# EAGLE board shiht_register's_board (EAGLE 8.3.2)
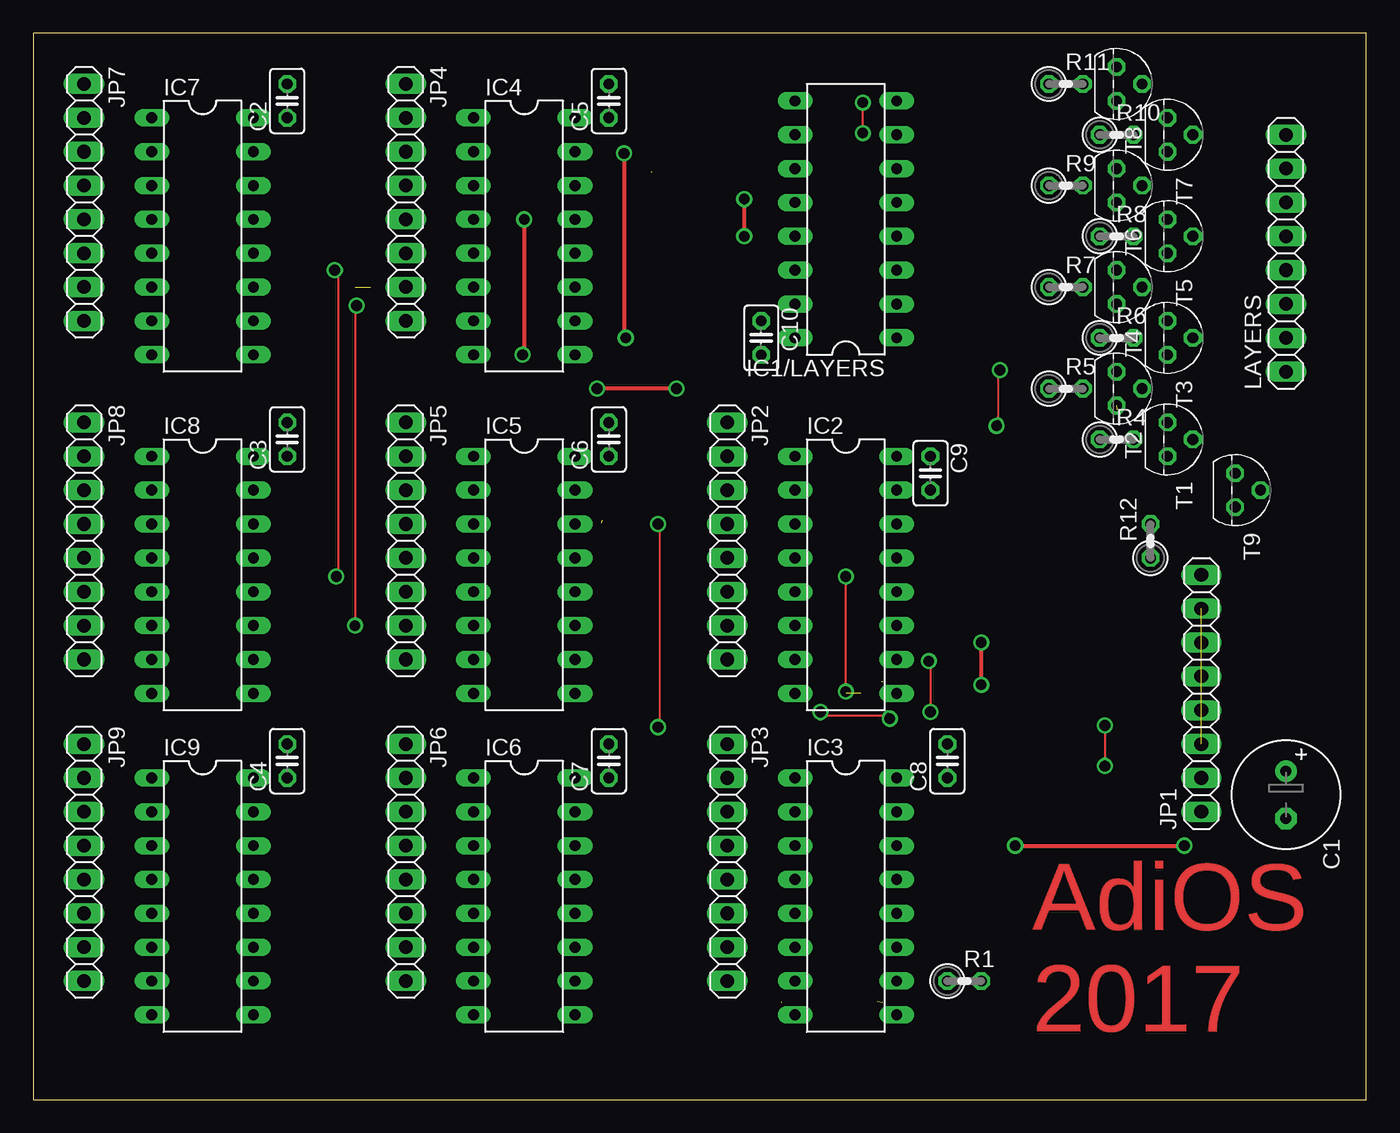
[diagram p0: board, top side]
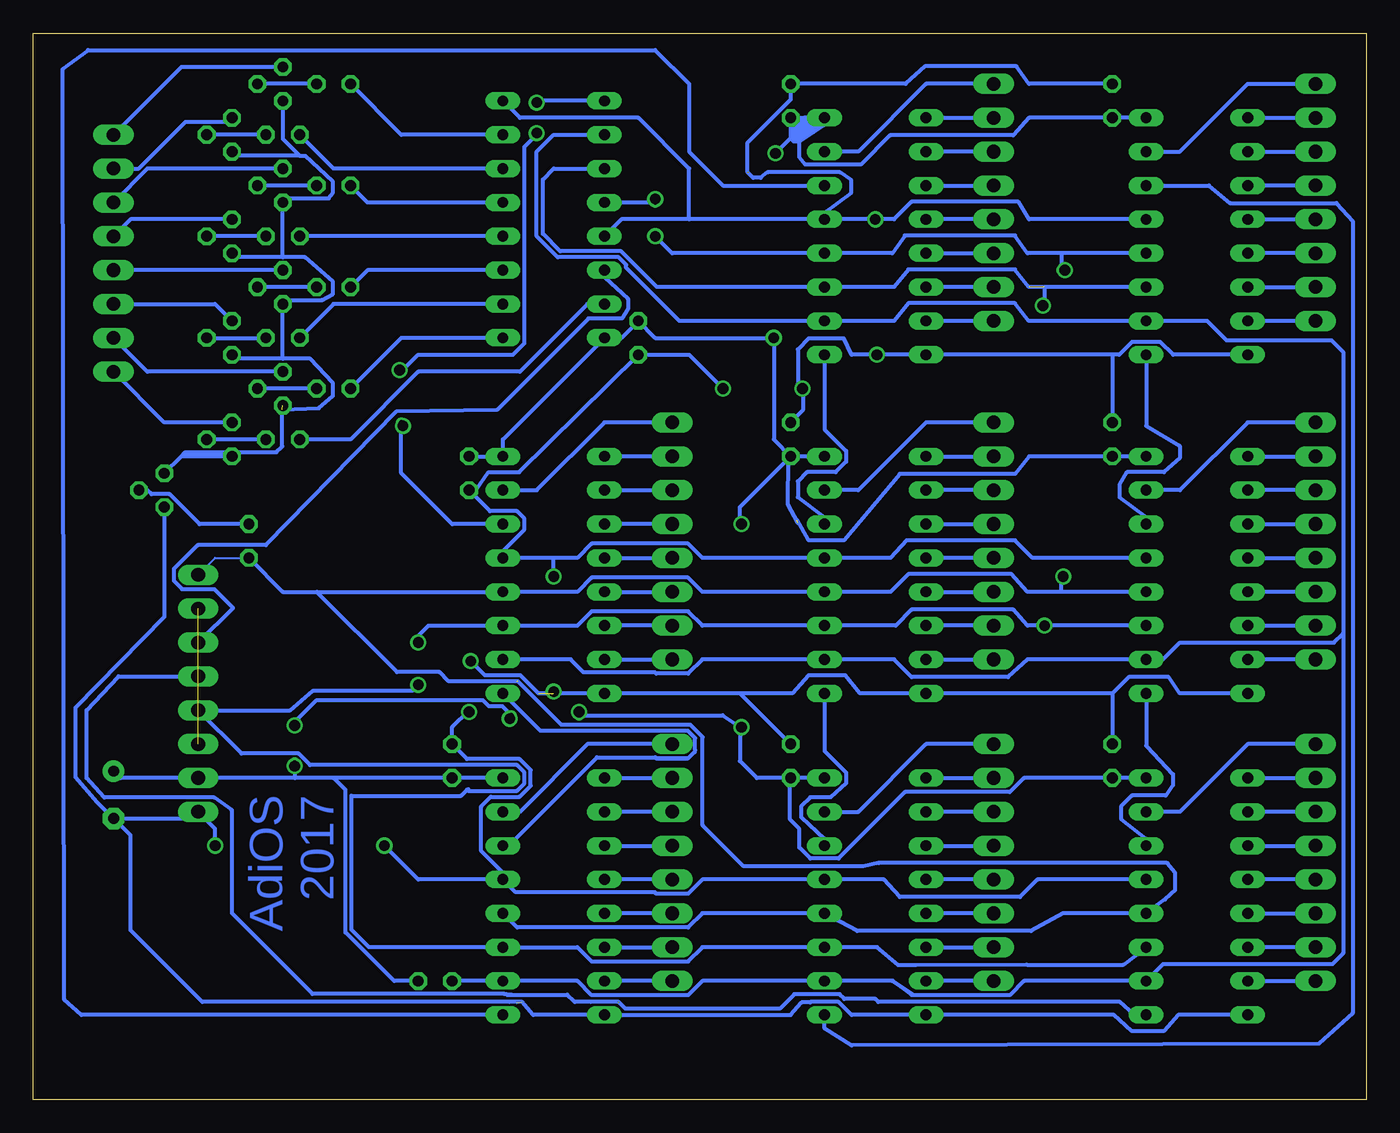
[diagram p1: board, bottom side, seen from below]

Size 100 x 80 mm. Coordinates in mm from the lower left corner, seen from the top.
Outline: 0,0 100,0 100,80 0,80 0,0
Copper layers (1*16): Top 0.035mm / dielectric 1.5mm / Bottom 0.035mm
Design rules "default": minimum track width 6mil, minimum drill 0.35mm, track to track 6mil, track to pad 6mil, pad to pad 6mil, via to via 6mil, smd to smd 6mil, copper to edge 40mil, drill to drill 6mil, minimum pad ring 10mil, minimum via ring 8mil, stop-mask expansion 4mil, vias tented up to drill 0mil, thermal gap 10mil

## Footprints (pad centres in the part's own frame; a part is rotated, then mirrored left to right if it is on the bottom)
E3,5-8 = drill 0.813 pad 1.6: + -1.778,0 | drill 0.813 pad 1.6 octagon: - 1.778,0
C025-025X050 = drill 0.813 octagon: 1 -1.27,0; 2 1.27,0
DIL16 = drill 0.813 long: 1 -8.89,-3.81; 2 -6.35,-3.81; 3 -3.81,-3.81; 4 -1.27,-3.81; 5 1.27,-3.81; 6 3.81,-3.81; 7 6.35,-3.81; 8 8.89,-3.81; 9 8.89,3.81; 10 6.35,3.81; 11 3.81,3.81; 12 1.27,3.81; 13 -1.27,3.81; 14 -3.81,3.81; 15 -6.35,3.81; 16 -8.89,3.81
1X08 = drill 1.016 long: 1 -8.89,0; 2 -6.35,0; 3 -3.81,0; 4 -1.27,0; 5 1.27,0; 6 3.81,0; 7 6.35,0; 8 8.89,0
0207/2V = drill 0.813 octagon: 1 -1.27,0; 2 1.27,0
TO92 = drill 0.813 octagon: 1 1.27,0; 2 0,1.905; 3 -1.27,0

## Placement (x,y rotation side)
C1  220uF  [E3,5-8]  93.98,22.86 270 top
C2  100nF  [C025-025X050]  19.05,74.93 90 top
C3  100nF  [C025-025X050]  19.05,49.53 90 top
C4  100nF  [C025-025X050]  19.05,25.4 90 top
C5  100nF  [C025-025X050]  43.18,74.93 90 top
C6  100nF  [C025-025X050]  43.18,49.53 90 top
C7  100nF  [C025-025X050]  43.18,25.4 90 top
C8  100nF  [C025-025X050]  68.58,25.4 90 top
C9  100nF  [C025-025X050]  67.31,46.99 270 top
C10  100nF  [C025-025X050]  54.61,57.15 270 top
IC1/LAYERS  74HC595N  [DIL16]  60.96,66.04 90 top
IC2  74HC595N  [DIL16]  60.96,39.37 270 top
IC3  74HC595N  [DIL16]  60.96,15.24 270 top
IC4  74HC595N  [DIL16]  36.83,64.77 270 top
IC5  74HC595N  [DIL16]  36.83,39.37 270 top
IC6  74HC595N  [DIL16]  36.83,15.24 270 top
IC7  74HC595N  [DIL16]  12.7,64.77 270 top
IC8  74HC595N  [DIL16]  12.7,39.37 270 top
IC9  74HC595N  [DIL16]  12.7,15.24 270 top
JP1  [1X08]  87.63,30.48 90 top
JP2  [1X08]  52.07,41.91 270 top
JP3  [1X08]  52.07,17.78 270 top
JP4  [1X08]  27.94,67.31 270 top
JP5  [1X08]  27.94,41.91 270 top
JP6  [1X08]  27.94,17.78 270 top
JP7  [1X08]  3.81,67.31 270 top
JP8  [1X08]  3.81,41.91 270 top
JP9  [1X08]  3.81,17.78 270 top
LAYERS  [1X08]  93.98,63.5 90 top
R1  330  [0207/2V]  69.85,8.89 0 top
R4  1k  [0207/2V]  81.28,49.53 0 top
R5  1k  [0207/2V]  77.47,53.34 0 top
R6  1k  [0207/2V]  81.28,57.15 0 top
R7  1k  [0207/2V]  77.47,60.96 0 top
R8  1k  [0207/2V]  81.28,64.77 0 top
R9  1k  [0207/2V]  77.47,68.58 0 top
R10  1k  [0207/2V]  81.28,72.39 0 top
R11  1k  [0207/2V]  77.47,76.2 0 top
R12  1k  [0207/2V]  83.82,41.91 90 top
T1  BC337  [TO92]  85.09,49.53 270 top
T2  BC337  [TO92]  81.28,53.34 270 top
T3  BC337  [TO92]  85.09,57.15 270 top
T4  BC337  [TO92]  81.28,60.96 270 top
T5  BC337  [TO92]  85.09,64.77 270 top
T6  BC337  [TO92]  81.28,68.58 270 top
T7  BC337  [TO92]  85.09,72.39 270 top
T8  BC337  [TO92]  81.28,76.2 270 top
T9  BC337  [TO92]  90.17,45.72 270 top

## Library data of the parts
C1-C10 R1 R4-R12 = rcl
IC1/LAYERS IC2-IC9 = 74xx-eu
JP1-JP9 LAYERS = pinhead
T1-T9 = transistor

## Nets
GND: C1.- C2.2 C3.2 C4.2 C5.2 C6.2 C7.2 C8.2 C9.2 C10.2 IC1/LAYERS.8 IC1/LAYERS.13 IC2.8 IC2.13 IC3.8 IC3.13 IC4.8 IC4.13 IC5.8 IC5.13 IC6.8 IC6.13 IC7.8 IC7.13 IC8.8 IC8.13 IC9.8 IC9.13 JP1.1 T9.1
GND2: JP1.3 JP1.7
LAYER1: IC1/LAYERS.15 R4.1
LAYER2: IC1/LAYERS.1 R5.1
LAYER3: IC1/LAYERS.2 R6.1
LAYER4: IC1/LAYERS.3 R7.1
LAYER5: IC1/LAYERS.4 R8.1
LAYER6: IC1/LAYERS.5 R9.1
LAYER7: IC1/LAYERS.6 R10.1
LAYER8: IC1/LAYERS.7 R11.1
MISO: IC9.9 JP1.5
MOSI: IC1/LAYERS.14 JP1.6
N$1: IC9.15 JP9.1
N$2: IC9.1 JP9.2
N$3: IC9.2 JP9.3
N$4: IC9.3 JP9.4
N$5: IC9.4 JP9.5
N$6: IC9.5 JP9.6
N$7: IC9.6 JP9.7
N$8: IC9.7 JP9.8
N$9: IC2.15 JP2.1
N$10: IC2.1 JP2.2
N$11: IC2.2 JP2.3
N$12: IC2.3 JP2.4
N$13: IC2.4 JP2.5
N$14: IC2.5 JP2.6
N$15: IC2.6 JP2.7
N$16: IC2.7 JP2.8
N$17: IC3.15 JP3.1
N$18: IC3.1 JP3.2
N$19: IC3.2 JP3.3
N$20: IC3.3 JP3.4
N$21: IC3.4 JP3.5
N$22: IC3.5 JP3.6
N$23: IC3.6 JP3.7
N$24: IC3.7 JP3.8
N$25: IC6.15 JP6.1
N$26: IC6.1 JP6.2
N$27: IC6.2 JP6.3
N$28: IC6.3 JP6.4
N$29: IC6.4 JP6.5
N$30: IC6.5 JP6.6
N$31: IC6.6 JP6.7
N$32: IC6.7 JP6.8
N$33: IC5.15 JP5.1
N$34: IC5.1 JP5.2
N$35: IC5.2 JP5.3
N$36: IC5.3 JP5.4
N$37: IC5.4 JP5.5
N$38: IC5.5 JP5.6
N$39: IC5.6 JP5.7
N$40: IC5.7 JP5.8
N$41: IC8.15 JP8.1
N$42: IC8.1 JP8.2
N$43: IC8.2 JP8.3
N$44: IC8.3 JP8.4
N$45: IC8.4 JP8.5
N$46: IC8.5 JP8.6
N$47: IC8.6 JP8.7
N$48: IC8.7 JP8.8
N$49: IC7.15 JP7.1
N$50: IC7.1 JP7.2
N$51: IC7.2 JP7.3
N$52: IC7.3 JP7.4
N$53: IC7.4 JP7.5
N$54: IC7.5 JP7.6
N$55: IC7.6 JP7.7
N$56: IC7.7 JP7.8
N$57: IC4.15 JP4.1
N$58: IC4.1 JP4.2
N$59: IC4.2 JP4.3
N$60: IC4.3 JP4.4
N$61: IC4.4 JP4.5
N$62: IC4.5 JP4.6
N$63: IC4.6 JP4.7
N$64: IC4.7 JP4.8
N$66: IC1/LAYERS.9 IC2.14
N$67: IC2.9 IC3.14
N$68: IC3.9 IC4.14
N$69: IC4.9 IC5.14
N$70: IC5.9 IC6.14
N$71: IC6.9 IC7.14
N$72: IC7.9 IC8.14
N$73: IC8.9 IC9.14
N$74: LAYERS.1 T1.3
N$75: LAYERS.2 T2.3
N$76: LAYERS.3 T3.3
N$77: LAYERS.4 T4.3
N$78: LAYERS.5 T5.3
N$80: IC1/LAYERS.10 IC2.10 IC3.10 IC4.10 IC5.10 IC6.10 IC7.10 IC8.10 IC9.10 R1.1
N$81: LAYERS.6 T6.3
N$82: LAYERS.7 T7.3
N$83: LAYERS.8 T8.3
N$84: T1.1 T2.1 T3.1 T4.1 T5.1 T6.1 T7.1 T8.1 T9.3
N$85: R4.2 T1.2
N$86: R5.2 T2.2
N$87: R6.2 T3.2
N$88: R7.2 T4.2
N$89: R8.2 T5.2
N$90: R9.2 T6.2
N$91: R10.2 T7.2
N$92: R11.2 T8.2
N$101: R12.2 T9.2
SCK: IC1/LAYERS.11 IC2.11 IC3.11 IC4.11 IC5.11 IC6.11 IC7.11 IC8.11 IC9.11 JP1.4
SS: IC1/LAYERS.12 IC2.12 IC3.12 IC4.12 IC5.12 IC6.12 IC7.12 IC8.12 IC9.12 JP1.8 R12.1
VCC: C1.+ C2.1 C3.1 C4.1 C5.1 C6.1 C7.1 C8.1 C9.1 C10.1 IC1/LAYERS.16 IC2.16 IC3.16 IC4.16 IC5.16 IC6.16 IC7.16 IC8.16 IC9.16 JP1.2 R1.2

## Tracks (layer width: path | path; a pad name or v marks a point on that pad's centre or on a via)
GND  (via drill 0.35, 0.8)  (3 unrouted)
  Top 0.152: v60.96,30.48 v60.96,30.61 v60.96,39.24 v60.96,39.37 | v67.31,33.02 v67.31,29.21
  Top 0.305: v36.83,66.04 v36.83,55.88 | v48.26,53.34 v42.29,53.34 v42.27,53.34 | v73.66,19.05 v86.36,19.05
  Bottom 0.152: IC2.8 46.99,30.48 43.05,30.48 | 60.96,40.64 59.07,40.64 | 49.91,40.64 IC5.13 | 63.74,7.24 64.31,7.24 | 46.33,69.6 45.97,69.24 45.47,69.24
  Bottom 0.305: IC8.8 13.98,30.48 14.81,31.7 17.82,31.7 19.04,30.48 19.05,30.48 | 19.05,30.48 IC5.8 37.98,30.48 39.07,31.83 41.83,31.83 43.05,30.48 IC2.8 62.1,30.48 63.44,31.83 66.12,31.83 v67.18,32.89 v67.31,33.02 | 19.05,30.48 C4.2 | IC7.8 14.48,55.88 15.45,56.84 17.57,56.84 18.54,55.88 19.05,55.88 | 19.05,55.88 IC4.8 v36.7,55.88 v36.83,55.88 38.62,55.88 39.2,57.1 41.83,57.1 42.65,56.28 42.65,53.7 v42.29,53.34 | 19.05,55.88 C3.2 | IC8.13 25.03,40.64 26.36,41.96 34.49,41.96 35.68,40.64 IC5.13 49.8,40.64 50.87,41.71 58.11,41.71 59.17,40.64 60.96,40.64 | 60.96,40.64 IC2.13 64.77,41.16 63.14,42.78 63.14,43.58 63.71,44.15 65.73,44.15 C9.2 66.8,45.72 65.83,47.07 63.55,47.07 C10.2 50.8,55.88 v48.26,53.34 | IC9.8 14.1,6.35 15.2,5.13 17.57,5.13 18.92,6.35 IC6.8 38.62,6.35 39.58,7.32 41.7,7.32 41.72,7.29 42.36,7.29 43.18,6.35 IC3.8 62.49,6.35 63.33,7.32 87.33,7.32 92.71,12.7 92.71,19.81 C1.- | IC9.13 24.65,16.51 25.97,15.19 34.99,15.19 36.19,16.51 IC6.13 49.8,16.51 50.87,15.44 53.27,15.44 53.38,15.54 63.8,15.54 IC3.13 | C1.- 88.14,21.08 JP1.1 86.36,20.32 v86.36,19.05 | IC3.13 64.77,17.02 66.4,18.65 66.4,21.99 65.68,22.71 63.52,22.71 62.69,23.54 62.69,24.72 63.52,25.55 67.46,25.55 C8.2 68.58,27.94 v67.31,29.21 | C7.2 46.99,30.48 | C6.2 42.27,51.71 v42.27,53.34 | C1.- 95.1,22.2 95.24,22.33 96.85,24.2 96.85,29.4 90.17,36.21 T9.1 | IC4.13 40.64,66.56 38.63,68.05 38.63,68.98 39.48,69.57 44.91,69.57 45.44,69.17 46,69.17 46.4,69.57 46.4,71.8 43.18,75.03 C5.2 34.56,76.2 33.11,77.52 26.23,77.52 25.29,76.2 C2.2 | IC7.13 25.29,66.04 26.1,67.36 34.11,67.36 35.43,66.04 v36.83,66.04 IC4.13
  Bottom 0.305: IC4.13 50.8,66.04 | 50.8,66.04 50.8,69.85 54.61,73.66 63.5,73.66 IC1/LAYERS.8 | 50.8,66.04 55.88,66.04 IC1/LAYERS.13 | IC3.13 71.12,16.51 v73.66,19.05 | v60.96,39.37 60.96,40.64
GND2  (1 unrouted)
LAYER1
  Bottom 0.305: IC1/LAYERS.15 58.42,59.69 63.5,54.61 71.12,54.61 76.2,49.53 R4.1
LAYER2
  Bottom 0.305: IC1/LAYERS.1 72.39,57.15 R5.1
LAYER3
  Bottom 0.305: IC1/LAYERS.2 77.47,59.69 R6.1
LAYER4
  Bottom 0.305: IC1/LAYERS.3 74.93,62.23 R7.1
LAYER5
  Bottom 0.305: IC1/LAYERS.4 R8.1
LAYER6
  Bottom 0.305: IC1/LAYERS.5 74.93,67.31 R9.1
LAYER7
  Bottom 0.305: IC1/LAYERS.6 77.47,69.85 R10.1
LAYER8
  Bottom 0.305: IC1/LAYERS.7 72.39,72.39 R11.1
MISO  (1 unrouted)
  Bottom 0.152: 56.12,7.24 58.18,7.24 | 64.08,7.92 64.66,7.92
  Bottom 0.305: IC9.9 17.38,6.35 18.47,7.32 36.6,7.32 36.83,7.54 39.16,7.54 39.52,7.9 42.9,7.9 43.99,6.81 55.58,6.81 56.09,7.32 59.38,7.32 59.94,7.87 64.48,7.87 64.53,7.92 64.66,7.92 79.05,7.92 85.09,13.97 85.09,21.59 85.11,21.72 86.43,22.66 94.67,22.66 96.01,24.13 96.01,29.21 93.6,31.75 JP1.5
MOSI
  Bottom 0.305: JP1.6 85.02,36.9 86.43,38.3 88.83,38.3 89.46,38.93 89.46,39.81 87.67,41.6 82.55,41.6 72.8,51.61 65.22,51.74 58.36,58.6 55.84,58.6 55.4,59.29 55.4,60.09 57.15,61.72 IC1/LAYERS.14
N$1
  Bottom 0.305: JP9.1 8.89,26.67 13.97,21.59 IC9.15
N$2
  Bottom 0.305: IC9.1 JP9.2
N$3
  Bottom 0.305: JP9.3 IC9.2
N$4
  Bottom 0.305: IC9.3 JP9.4
N$5
  Bottom 0.305: JP9.5 IC9.4
N$6
  Bottom 0.305: IC9.5 JP9.6
N$7
  Bottom 0.305: JP9.7 IC9.6
N$8
  Bottom 0.305: IC9.7 JP9.8
N$9
  Bottom 0.305: JP2.1 57.15,50.8 62.23,45.72 IC2.15
N$10
  Bottom 0.305: JP2.2 IC2.1
N$11
  Bottom 0.305: IC2.2 JP2.3
N$12
  Bottom 0.305: JP2.4 IC2.3
N$13
  Bottom 0.305: IC2.4 JP2.5
N$14
  Bottom 0.305: IC2.5 JP2.6
N$15
  Bottom 0.305: JP2.7 IC2.6
N$16
  Bottom 0.305: IC2.7 JP2.8
N$17
  Bottom 0.305: JP3.1 58.42,26.67 63.5,21.59 IC3.15
N$18
  Bottom 0.305: IC3.1 JP3.2
N$19
  Bottom 0.305: JP3.3 IC3.2
N$20
  Bottom 0.305: IC3.3 JP3.4
N$21
  Bottom 0.305: JP3.5 IC3.4
N$22
  Bottom 0.305: JP3.6 IC3.5
N$23
  Bottom 0.305: IC3.6 JP3.7
N$24
  Bottom 0.305: JP3.8 IC3.7
N$25
  Bottom 0.305: JP6.1 33.02,26.67 38.1,21.59 IC6.15
N$26
  Bottom 0.305: IC6.1 JP6.2
N$27
  Bottom 0.305: JP6.3 IC6.2
N$28
  Bottom 0.305: IC6.3 JP6.4
N$29
  Bottom 0.305: JP6.5 IC6.4
N$30
  Bottom 0.305: JP6.6 IC6.5
N$31
  Bottom 0.305: IC6.6 JP6.7
N$32
  Bottom 0.305: JP6.8 IC6.7
N$33
  Bottom 0.305: JP5.1 33.02,50.8 38.1,45.72 IC5.15
N$34
  Bottom 0.305: IC5.1 JP5.2
N$35
  Bottom 0.305: JP5.3 IC5.2
N$36
  Bottom 0.305: IC5.3 JP5.4
N$37
  Bottom 0.305: JP5.5 IC5.4
N$38
  Bottom 0.305: IC5.5 JP5.6
N$39
  Bottom 0.305: JP5.7 IC5.6
N$40
  Bottom 0.305: IC5.7 JP5.8
N$41
  Bottom 0.305: JP8.1 8.89,50.8 13.97,45.72 IC8.15
N$42
  Bottom 0.305: IC8.1 JP8.2
N$43
  Bottom 0.305: JP8.3 IC8.2
N$44
  Bottom 0.305: IC8.3 JP8.4
N$45
  Bottom 0.305: IC8.4 JP8.5
N$46
  Bottom 0.305: JP8.6 IC8.5
N$47
  Bottom 0.305: IC8.6 JP8.7
N$48
  Bottom 0.305: JP8.8 IC8.7
N$49
  Bottom 0.305: IC7.15 13.97,71.12 8.89,76.2 JP7.1
N$50
  Bottom 0.305: IC7.1 JP7.2
N$51
  Bottom 0.305: IC7.2 JP7.3
N$52
  Bottom 0.305: JP7.4 IC7.3
N$53
  Bottom 0.305: IC7.4 JP7.5
N$54
  Bottom 0.305: JP7.6 IC7.5
N$55
  Bottom 0.305: IC7.6 JP7.7
N$56
  Bottom 0.305: JP7.8 IC7.7
N$57
  Bottom 0.305: IC4.15 38.1,71.12 33.02,76.2 JP4.1
N$58
  Bottom 0.305: IC4.1 JP4.2
N$59
  Bottom 0.305: JP4.3 IC4.2
N$60
  Bottom 0.305: IC4.3 JP4.4
N$61
  Bottom 0.305: JP4.5 IC4.4
N$62
  Bottom 0.305: IC4.5 JP4.6
N$63
  Bottom 0.305: JP4.7 IC4.6
N$64
  Bottom 0.305: JP4.8 IC4.7
N$66  (via drill 0.35, 0.8)
  Top 0.152: v72.39,50.8 v72.39,54.61 | v62.23,72.39 v62.23,72.52 v62.23,74.8 v62.23,74.93
  Bottom 0.152: v62.23,72.39 v62.23,72.52 62.23,72.67
  Bottom 0.305: IC2.14 68.58,43.18 72.39,46.99 v72.39,50.8 | IC1/LAYERS.9 v62.23,74.93 | v72.39,54.61 71.12,55.88 64.02,55.88 63.14,56.75 63.14,71.48 v62.23,72.39
N$67
  Bottom 0.152: 50.32,26.26 50.35,26.22 50.9,25.68 57.71,25.68 | 50.32,27.08 50.9,27.66
  Bottom 0.305: IC3.14 64.34,19.05 57.71,25.68 53.35,25.68 53.27,25.6 50.87,25.6 50.39,26.08 | 50.35,26.22 50.35,27.12 50.9,27.66 61.95,27.66 IC2.9
N$68
  Bottom 0.305: IC3.9 96.39,6.35 97.66,7.49 97.79,77.34 95.89,78.74 53.34,78.74 50.8,76.2 50.8,71.12 48.26,68.58 IC4.14
N$69
  Bottom 0.305: IC4.9 40.64,50.28 39.01,48.66 39.01,47.86 39.81,47.07 41.95,47.07 42.65,46.37 42.65,45.19 40.64,43.7 IC5.14
N$70
  Bottom 0.305: IC5.9 40.64,26.16 39.01,24.53 39.01,23.73 40.19,22.68 41.7,22.68 42.39,21.99 42.39,21.19 40.64,19.57 IC6.14
N$71
  Bottom 0.305: IC7.14 11.8,68.58 10.23,67.26 2.23,67.26 1.02,65.91 1.02,6.48 3.56,4.19 38.61,4.06 40.64,5.33 IC6.9
N$72
  Bottom 0.305: IC7.9 16.51,50.54 13.99,49.04 13.99,48.11 15.17,47.07 17.95,47.07 18.52,46.12 18.52,45.19 16.51,43.7 IC8.14
N$73
  Bottom 0.305: IC8.9 16.51,26.54 14.5,24.4 14.5,23.6 15.04,22.81 17.57,22.81 18.39,21.99 18.39,21.06 16.51,19.57 IC9.14
N$74
  Bottom 0.305: T1.3 90.17,50.8 LAYERS.1
N$75
  Bottom 0.305: T2.3 91.44,54.61 LAYERS.2
N$76
  Bottom 0.305: LAYERS.3 86.36,59.69 T3.3
N$77
  Bottom 0.305: T4.3 LAYERS.4
N$78
  Bottom 0.305: T5.3 92.71,66.04 LAYERS.5
N$80
  Bottom 0.305: 1.73,34.98 1.73,56.08 2.62,56.97 10.48,56.97 11.93,58.42 IC7.10 25.29,58.42 26.36,59.74 34.36,59.74 35.43,58.42 IC4.10 51.53,58.42 55.52,62.41 55.52,62.63 56.09,63.2 60.66,63.2 62.23,64.77 62.23,71.12 60.96,72.39 IC1/LAYERS.10 | 1.73,34.98 2.41,34.29 13.97,34.29 15.24,33.02 IC8.10 25.41,33.02 26.86,31.7 34.11,31.7 35.43,33.02 IC5.10 49.8,33.02 50.87,31.95 53.27,31.95 53.38,32.05 58.73,32.05 59.69,33.02 IC2.10 | 1.73,34.98 1.73,10.97 2.54,10.16 15.24,10.16 IC9.10 25.67,8.89 26.74,7.82 34.09,7.82 35.53,8.91 34.06,7.9 35.56,8.89 IC6.10 49.8,8.89 50.87,7.82 58.11,7.82 59.17,8.89 IC3.10 R1.1
N$81
  Bottom 0.305: T6.3 91.44,69.85 LAYERS.6
N$82
  Bottom 0.305: LAYERS.7 92.09,69.85 88.58,73.36 85.39,73.36 T7.3
N$83
  Bottom 0.305: T8.3 88.9,77.47 LAYERS.8
N$84  (1 unrouted)
  Bottom 0.305: T3.1 84.78,55.58 81.28,55.58 | 81.28,55.58 79.23,55.58 77.52,53.74 77.52,52.81 78.58,51.88 81.33,51.75 81.33,49 81.77,48.56 88.59,48.56 88.9,48.26 | T9.3 88.9,48.26 | T1.1 88.9,48.26 | 81.28,55.58 T4.1 80.97,59.99 78.34,59.99 77.52,60.43 77.52,61.36 79.61,63.2 81.28,63.2 | T5.1 84.78,63.2 81.28,63.2 | 81.28,63.2 T6.1 80.97,67.61 77.83,67.61 77.52,68.05 77.52,68.85 79.61,70.81 80.01,70.81 | T7.1 84.78,70.81 80.01,70.81 | T8.1 81.28,72.08 80.01,70.81
N$85
  Bottom 0.305: R4.2 T1.2
N$86
  Bottom 0.305: R5.2 T2.2
N$87
  Bottom 0.305: T3.2 R6.2
N$88
  Bottom 0.152: 82.55,60.96 T4.2
  Bottom 0.305: R7.2 82.55,60.96
N$89
  Bottom 0.305: R8.2 T5.2
N$90
  Bottom 0.305: R9.2 T6.2
N$91
  Bottom 0.305: R10.2 T7.2
N$92
  Bottom 0.152: 82.55,76.2 T8.2
  Bottom 0.305: R11.2 82.55,76.2
N$101
  Bottom 0.152: 91.44,45.72 T9.2
  Bottom 0.305: 91.44,45.72 91.14,45.41 89.77,45.41 87.53,43.18 R12.2
S$1  (via drill 0.8)
  other vias: 67.31,29.08
S$2  (via drill 0.8)
  other vias: 64.26,28.57
S$3  (via drill 0.8)
  other vias: 59.05,29.08
S$4  (via drill 0.8)
  other vias: 72.52,54.74
S$5  (via drill 0.8)
  other vias: 72.26,50.55
S$6  (via drill 0.8)
  other vias: 46.86,43.18
S$7  (via drill 0.8)
  other vias: 46.86,27.94
S$8  (via drill 0.8)
  other vias: 22.73,39.24
S$9  (via drill 0.8)
  other vias: 24.26,59.56
S$10  (via drill 0.8)
  other vias: 22.61,62.23
S$11  (via drill 0.8)
  other vias: 53.34,67.56
SCK  (via drill 0.35, 0.8)  (1 unrouted)
  Top 0.152: v24.13,59.69 v24.13,35.56
  Top 0.305: v71.12,31.11 v71.12,34.29
  Bottom 0.305: IC9.11 18.21,10.11 25.46,10.11 33.82,10.08 35.1,10.08 36.7,11.43 IC6.11 49.8,11.43 50.87,10.36 58.11,10.36 59.17,11.43 IC3.11 74.82,11.43 76.12,12.73 76.12,22.78 67.92,22.78 67.46,23.24 67.45,23.24 | 67.45,23.24 67.39,23.26 67.36,23.29 | 67.45,23.24 67.38,23.16 63.71,23.16 63.14,23.73 63.14,24.53 63.71,25.09 79.25,25.09 80.11,25.96 84.38,25.96 JP1.4 80.72,29.21 79,30.68 71.55,30.68 71.12,30.99 v71.12,31.11 | IC8.11 v24.13,35.56 25.41,35.56 26.48,36.75 34.11,36.75 35.3,35.56 IC5.11 49.8,35.56 50.87,36.63 58.11,36.63 59.17,35.56 IC2.11 70.36,35.56 71.12,34.8 v71.12,34.29 | IC7.11 25.29,60.96 26.36,62.28 34.36,62.28 35.43,60.96 IC4.11 53.21,60.96 55.9,63.65 60.47,63.65 61.77,64.96 61.77,69.04 60.96,69.85 IC1/LAYERS.11 | 24.13,60.96 v24.13,59.69
SS  (via drill 0.35, 0.8)  (1 unrouted)
  Top 0.152: v22.86,62.23 v22.86,39.37
  Top 0.305: v53.34,64.77 v53.34,67.31
  Bottom 0.152: 25.41,38.1 22.86,38.1 IC8.12 | IC2.12 78.74,38.1 | 78.74,38.1 81.28,38.1 | R12.1 86.36,40.64 JP1.8 | 14.92,17.72 14.95,17.75 | 77.31,36.55 77.47,36.83 78.74,38.1
  Bottom 0.305: IC8.12 25.41,38.1 26.61,39.42 34.36,39.42 35.68,38.1 IC5.12 49.8,38.1 50.87,39.17 58.11,39.17 59.17,38.1 IC2.12 81.28,38.1 R12.1 | 22.86,38.1 v22.86,39.37 | IC3.12 63.7,12.9 50.87,12.9 49.8,13.97 IC6.12 38.17,12.64 25.14,12.64 22.75,13.97 IC9.12 15.09,15.01 14.33,15.75 14.33,17 14.92,17.72 | 14.95,17.75 36.58,17.75 37.72,17.5 46.71,17.5 49.78,20.57 49.78,27.19 50.71,28.12 60.38,28.12 63.63,31.37 | 63.74,31.37 68.83,31.37 69.53,32.07 72.71,32.07 78.74,38.1 | IC7.12 22.86,63.5 | 22.86,63.5 25.41,63.5 26.36,64.82 34.61,64.82 35.55,63.5 IC4.12 52.07,63.5 v53.34,64.77 | 22.86,63.5 v22.86,62.23 | v53.34,67.31 IC1/LAYERS.12
VCC  (via drill 0.35, 0.8)  (1 unrouted)
  Top 0.152: v46.99,43.18 v46.99,27.94 | v59.05,28.83 v64.14,28.83 64.01,28.57 | v80.39,28.19 v80.39,28.07 v80.39,25.27
  Top 0.305: v44.32,70.99 44.32,57.28 v44.45,57.15
  Bottom 0.152: 80.39,24.13 77.47,24.13 C8.1 | 40.64,23.94 IC6.16 | 40.64,73.14 40.64,73.04 | 58.8,28.96 v59.05,28.83
  Bottom 0.305: IC8.16 C3.1 25.29,48.26 26.36,46.94 34.98,46.94 39.2,41.96 41.83,41.96 42.7,43.47 | IC5.16 C6.1 | 42.62,43.24 43.38,44.65 43.36,48.18 43.1,48.18 C6.1 | v46.99,43.18 46.99,44.45 C6.1 | C6.1 44.45,49.53 v44.45,57.15 53.34,57.15 C10.1 55.88,57.15 IC1/LAYERS.16 64.77,49.53 IC2.16 C9.1 | IC9.16 C4.1 25.67,24.13 26.74,23.06 34.6,23.06 39.58,18.09 41.7,18.09 42.52,18.9 42.52,20.29 43.23,21 43.23,24.05 C7.1 | R1.2 72.93,8.89 76.58,12.54 76.58,23.24 77.47,24.13 | IC3.16 C8.1 80.39,24.13 | 80.39,24.13 JP1.2 93.47,24.13 C1.+ | v80.39,28.19 80.39,28.32 78.74,29.97 66.29,29.97 65.83,29.52 64.82,29.52 v64.14,28.83 | IC6.16 C7.1 | C7.1 45.72,24.13 46.99,25.4 v46.99,27.94 48.26,28.83 v59.05,28.83 | v80.39,25.27 v80.39,25.02 80.39,24.13 | IC7.16 C2.1 25.29,73.66 26.48,72.34 35.73,72.34 37.91,70.16 42.08,70.16 42.52,70.72 42.52,71.9 | 42.52,71.9 41.87,72.33 | 41.87,72.33 40.64,73.14 40.64,73.41 | 43.18,72.14 v44.32,70.99 | 43.18,73.15 43.18,72.77 | 43.18,73.41 43.18,73.15 | 43.18,73.41 C5.1 42.93,73.66 | 43.18,72.77 43.18,72.39 | 43.18,72.39 43.18,72.14 | 42.99,71.94 42.95,71.9 42.8,71.9 | 43.12,72.07 42.99,71.94 | 43.12,72.07 43.18,72.14 | 42.74,72.33 43.12,72.33 43.18,72.39 | 42.67,71.9 42.52,71.9 | 42.8,71.9 42.67,71.9 | 41.53,73.66 42.16,73.66 | 41.27,73.66 41.53,73.66 | 41.02,73.66 41.27,73.66 | 40.91,73.66 41.02,73.66 | 42.42,73.66 42.16,73.66 | 42.67,73.66 42.42,73.66 | 42.93,73.66 42.67,73.66 | 41.87,73.11 41.87,73.37 42.16,73.66 | 41.87,72.86 41.87,73.11 | 41.87,73.11 42.16,73.41 | 42.16,73.41 42.42,73.66 | 42.1,72.33 42.74,72.33 | 43.01,72.61 42.74,72.33 | 43.05,72.64 43.18,72.77 | 41.87,72.33 41.98,72.33 | 41.98,72.33 42.67,73.03 43.05,73.03 43.18,73.15
  Bottom 0.305: 41.87,72.61 41.87,72.86 | 41.87,72.86 42.29,73.28 | 42.29,73.28 42.67,73.66 | 41.98,72.33 42.1,72.33 | 42.93,73.15 42.1,72.33 | 43.12,73.34 42.93,73.15 | 43.12,73.34 43.18,73.41 | 41.87,72.56 41.87,72.61 | 41.87,72.61 42.93,73.66 | 41.87,73.06 41.87,73.32 41.53,73.66 | 41.87,72.81 41.87,73.06 | 41.87,73.06 41.27,73.66 | 41.87,72.7 41.87,72.81 | 41.87,72.81 41.02,73.66 | 40.77,73.66 IC4.16 40.64,73.41 | 40.77,73.66 40.91,73.66 | 41.87,72.7 42.67,71.9 | 41.87,72.61 42.09,72.61 | 42.09,72.61 42.8,71.9 | 42.09,72.61 42.33,72.61 | 42.33,72.61 42.99,71.94 | 42.33,72.61 42.58,72.61 | 42.58,72.61 43.12,72.07 | 42.58,72.61 43.01,72.61 | 43.01,72.61 43.05,72.64 | 41.87,72.86 42.84,72.86 43.05,72.64 | 42.16,73.41 42.67,73.41 | 42.8,73.28 42.67,73.41 | 42.8,73.28 42.93,73.15 | 42.29,73.28 42.8,73.28 | 42.67,73.41 43.05,73.41 43.12,73.34 | 41.87,72.7 40.91,73.66 | 41.87,72.61 41.44,72.61 40.64,73.41 | 41.87,72.33 41.87,72.56 | 41.87,72.56 40.77,73.66

## Text on the board
Top: AdiOS / 2017
Bottom: AdiOS / 2017